# Altium PCB USB-A-TH_C42425.pcbdoc
Units mm, origin at the board's own origin, x right, y up, seen from the top; angles counter-clockwise.
Board outline 27.2 x 24.98 mm, 2 copper layers (Top Layer, Bottom Layer); 1 components, 0 nets, 6 pads, 0 vias.
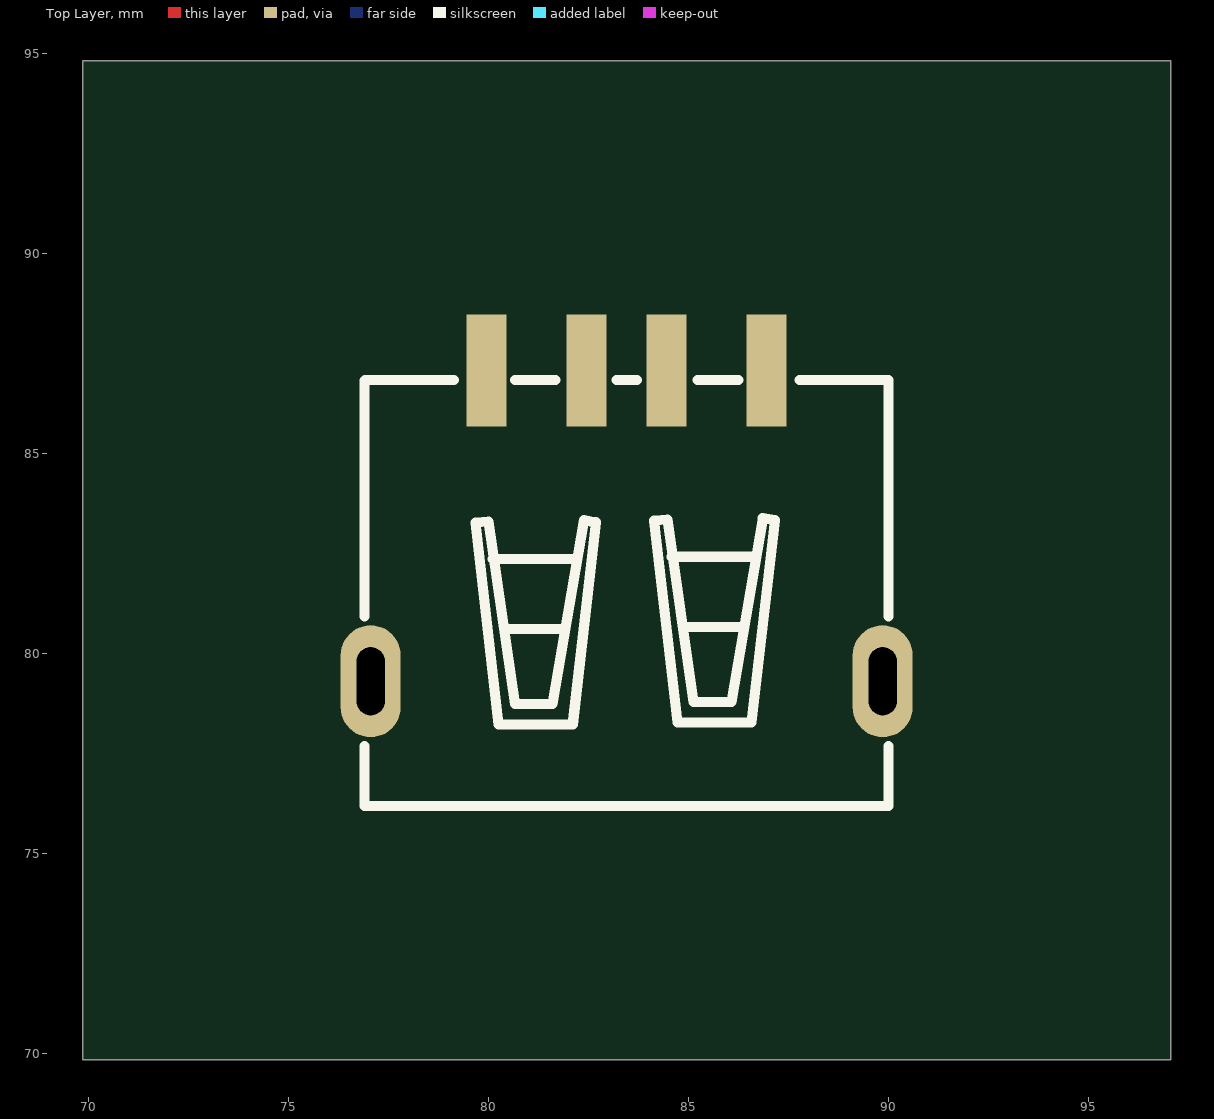
[diagram p0: Top Layer view]
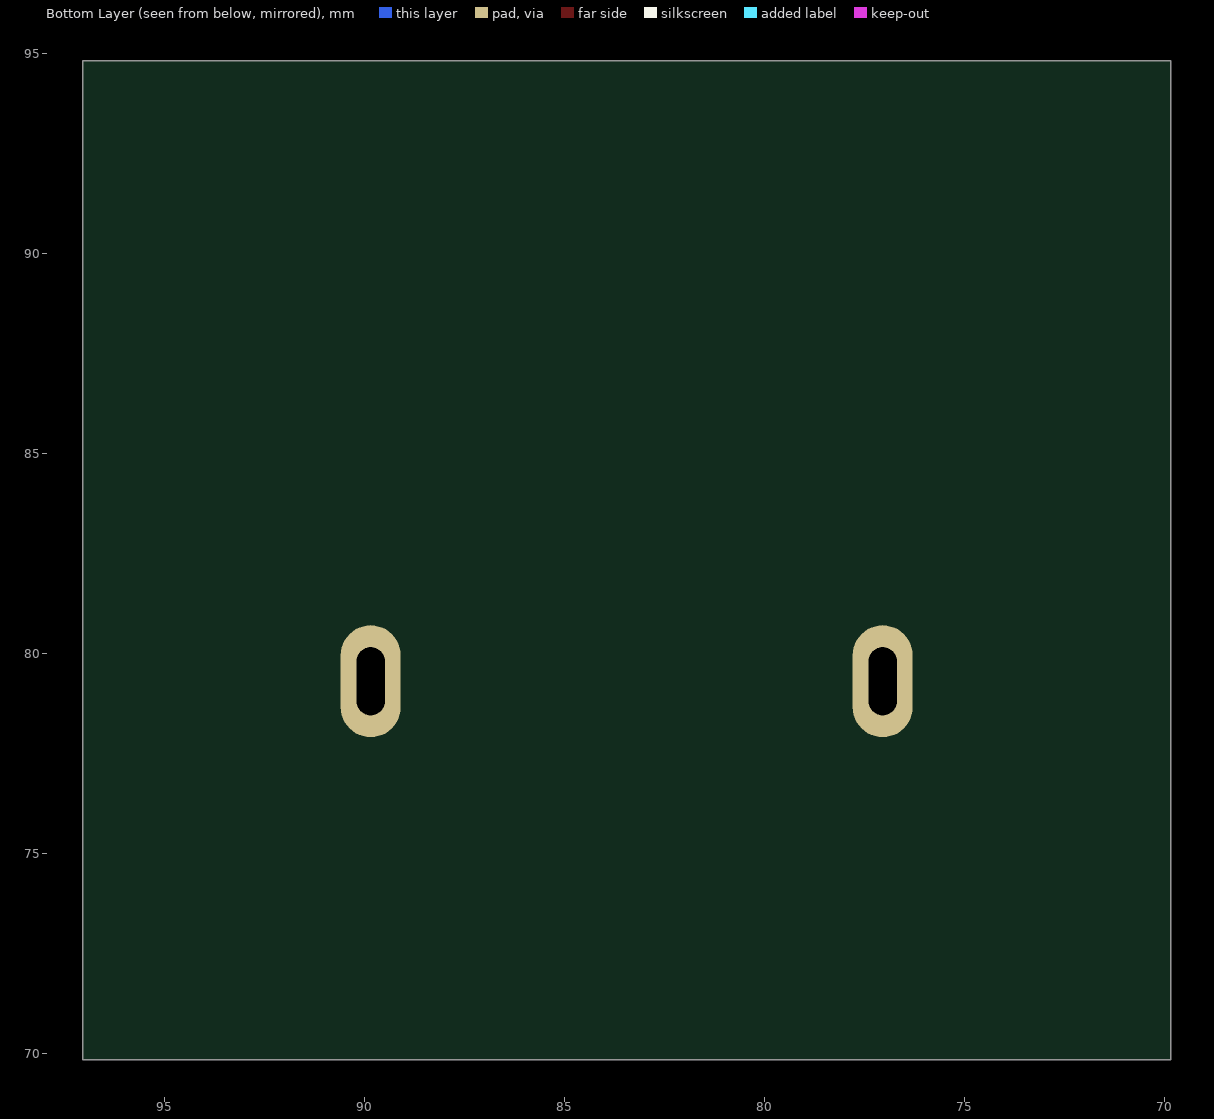
[diagram p1: Bottom Layer view, seen from below]

## Layer stack, top to bottom
Top Layer: signal copper (thickness not stored)
Dielectric: dielectric 0.32, FR-4, Dk 4.8
Bottom Layer: signal copper (thickness not stored)

## Board outline
97.05,69.85 69.85,69.85 69.85,94.833 97.05,94.833

## Components (designator, comment, footprint, x,y, rotation, side; value= is the part's Value field where it differs from the comment)
? "USB-A-TH_C42425" USB-A-TH_C42425 83.45,83.2 r0 top

## Footprints (in the part's own frame and the unit in brackets; to place one, negate y for a bottom-side part, rotate by r counter-clockwise, add the part's x,y. Pads: shape width x height; smd on the part's side, far side on the other; paste and mask are expansions set on the pad)
USB-A-TH_C42425 [mm]
  rect 1x2.8 smd: 1(-3.5,3.883) 2(-1,3.883) 3(1,3.883) 4(3.5,3.883)
  oval 1.5x2.8 hole 0.7 slot 1.7 at 90 deg: 5(6.4,-3.883) 6(-6.4,-3.883)
  silkscreen extent -6.55,-7 6.55,3.65

## Nets (pads, with @x,y where several pads share a name; then routed paths per layer and width w, separated by ;. In a path a pad name is that pad's centre, name@x,y a point inside that pad or via, vN(x,y) a via of type N, cw(c..) or ccw(c..) an arc to the next point about the centre after c; other vN are vias at no path point)
pads on no net: ?.1 ?.2 ?.3 ?.4 ?.5 ?.6